# Altium PCB SKR MINI E3V2 PCB.pcbdoc (part 1 of 2)
Units mil, origin at the board's own origin, x right, y up, seen from the top; angles counter-clockwise.
Board outline 4610 x 3845 mil, 2 copper layers (Top Layer, Bottom Layer); 144 components, 119 nets, 524 pads, 201 vias.
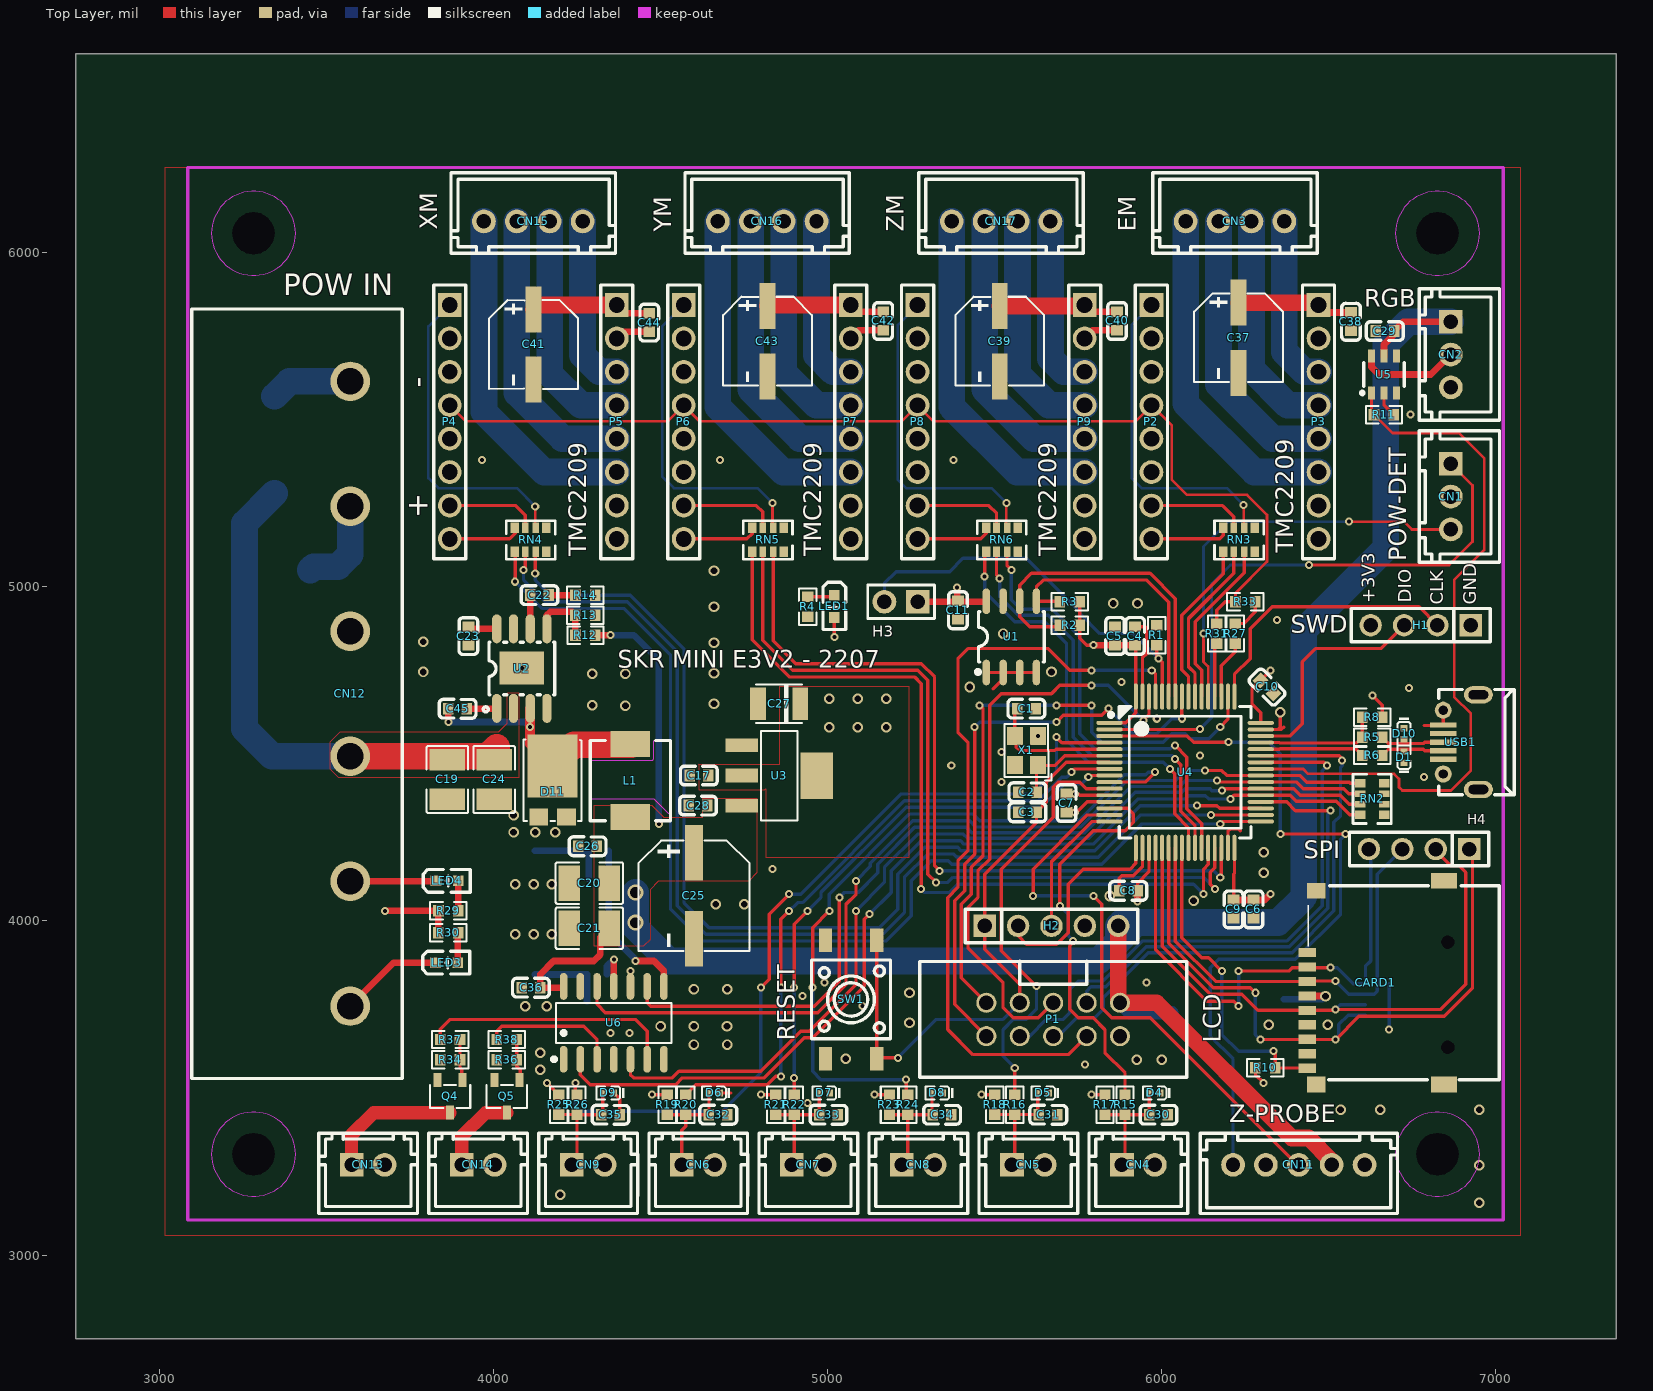
[diagram p0: Top Layer view]
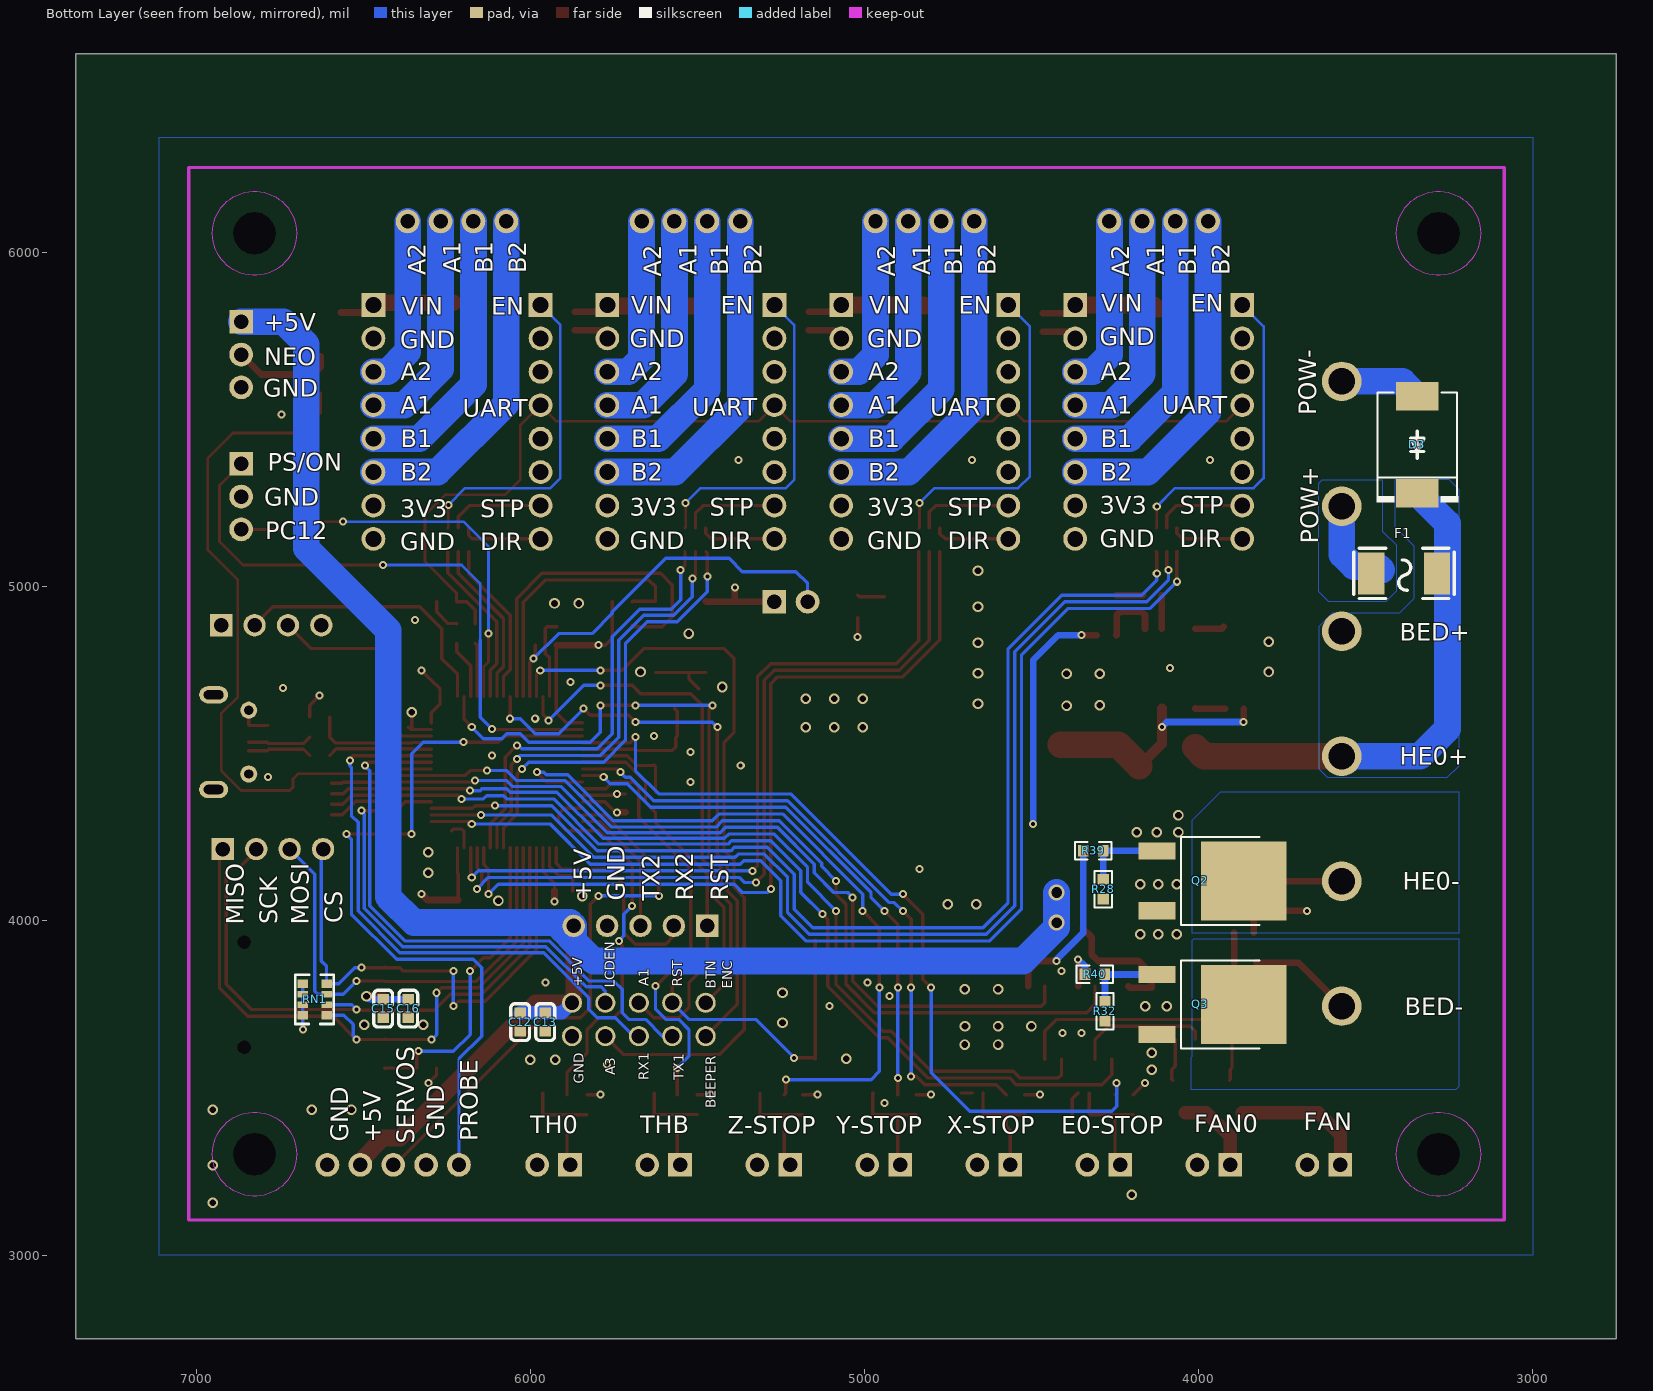
[diagram p1: Bottom Layer view, seen from below]

## Layer stack, top to bottom
Top Layer: signal copper (thickness not stored)
Dielectric: dielectric 12.6, FR-4, Dk 4.8
Bottom Layer: signal copper (thickness not stored)

## Board outline
7360,2750 2750,2750 2750,6595 7360,6595
cut-out: 3344.84,6057.76 ccw(c3281.85,6057.76) 3218.86,6057.76 ccw(c3281.85,6057.76)
cut-out: 6888.15,6057.76 ccw(c6825.16,6057.76) 6762.17,6057.76 ccw(c6825.16,6057.76)
cut-out: 3344.84,3301.85 ccw(c3281.85,3301.85) 3218.86,3301.85 ccw(c3281.85,3301.85)
cut-out: 6888.15,3301.85 ccw(c6825.16,3301.85) 6762.17,3301.85 ccw(c6825.16,3301.85)

## Components (designator, comment, footprint, x,y, rotation, side; value= is the part's Value field where it differs from the comment)
C1 "CC0603JRNPO9BN220" C0603 5595,4635 r0 top
C2 "CC0603JRNPO9BN220" C0603 5597.6,4385 r180 top
C3 "CC0603KRX5R8BB105" C0603 5597.6,4325 r180 top
C4 "CC0603KRX7R9BB104" C0603 5920,4852.6 r270 top
C5 "0603X106K160NT" C0603 5860,4852.6 r270 top
C6 "0603X106K160NT" C0603 6275,4035 r90 top
C7 "CC0603KRX7R9BB104" C0603 5715,4352.6 r270 top
C8 "CC0603KRX7R9BB104" C0603 5900,4090 r0 top
C9 "CC0603KRX7R9BB104" C0603 6215,4035 r90 top
C10 "CC0603KRX7R9BB104" C0603 6315,4700 r135 top
C11 "CC0603KRX7R9BB104" C0603 5390,4930 r90 top
C12 "0603X106K160NT" C0603 6030,3697.4 r90 bottom
C13 "CC0603KRX7R9BB104" C0603 5955,3697.4 r90 bottom
C15 "0603X106K160NT" C0603 6440,3737.6 r90 bottom
C16 "CC0603KRX7R9BB104" C0603 6365,3737.6 r90 bottom
C17 "CC0603KRX7R9BB104" C0603 4615,4435 r0 top
C19 "GRM32ER71H106KA12L" C1210 3862.04,4423.19 r90 top
C20 "GRM32ER71H106KA12L" C1210 4287.01,4113.16 r0 top
C21 "GRM32ER71H106KA12L" C1210 4287.01,3978.16 r0 top
C22 "CC0603KRX7R9BB472" C0603 4137.4,4975 r180 top
C23 "CC0603KRX7R9BB104" C0603 3925,4852.6 r90 top
C24 "GRM32ER71H106KA12L" C1210 4002.04,4423.19 r90 top
C25 "VEJ331M1ETR-0810" CAP-SMD_BD8.0-L8.3-W8.3-FD 4600,4075 r270 top
C26 "CC0603KRX7R9BB103" C0603 4282.01,4223.16 r0 top
C27 "TAJB106K016RNJ" CAP-SMD_L3.2-W2.8 4855,4650 r180 top
C28 "CC0603KRX7R9BB104" C0603 4612.4,4345 r0 top
C29 "CC0603KRX7R9BB104" C0603 6667.6,5765 r0 top
C30 "0603X106K160NT" C0603 5990,3420 r180 top
C31 "0603X106K160NT" C0603 5660,3420 r180 top
C32 "CC0603KRX7R9BB104" C0603 4672.4,3420 r180 top
C33 "CC0603KRX7R9BB104" C0603 5002.4,3420 r180 top
C34 "CC0603KRX7R9BB104" C0603 5342.4,3420 r180 top
C35 "CC0603KRX7R9BB104" C0603 4350,3420 r180 top
C36 "CC0603KRX7R9BB104" C0603 4112.4,3800 r0 top
C37 "DV101M035E077ETR" CAP-SMD_BD6.3-L6.6-W6.6-FD 6230,5745 r270 top
C38 "CC0603KRX7R9BB104" C0603 6566.3,5793.22 r90 top
C39 "DV101M035E077ETR" CAP-SMD_BD6.3-L6.6-W6.6-FD 5515,5735 r270 top
C40 "CC0603KRX7R9BB104" C0603 5866.3,5795.62 r90 top
C41 "DV101M035E077ETR" CAP-SMD_BD6.3-L6.6-W6.6-FD 4120,5725 r270 top
C42 "CC0603KRX7R9BB104" C0603 5166.3,5795.62 r90 top
C43 "DV101M035E077ETR" CAP-SMD_BD6.3-L6.6-W6.6-FD 4820,5735 r270 top
C44 "CC0603KRX7R9BB104" C0603 4466.3,5790.62 r90 top
C45 "CC0603KRX7R9BB103" C0603 3892.4,4635 r180 top
CARD1 "TF-01A" TF-SMD_TF-01A 6640,3815 r90 top
CN1 "HX25003-3A" CONN-TH_3P-P2.50_HX25003-3A 6865,5270 r90 top
CN2 "HX25003-3A" CONN-TH_3P-P2.50_HX25003-3A 6865,5695 r90 top
CN3 "HX25003-4A" CONN-TH_4P-P2.50_HX25003-4A 6219.14,6093.15 r180 top
CN4 "HX25003-2A" CONN-TH_2P-P2.50_HX25003-2A 5930,3270 r0 top
CN5 "HX25003-2A" CONN-TH_2P-P2.50_HX25003-2A 5600.71,3270 r0 top
CN6 "HX25003-2A" CONN-TH_2P-P2.50_HX25003-2A 4612.86,3270 r0 top
CN7 "HX25003-2A" CONN-TH_2P-P2.50_HX25003-2A 4942.14,3270 r0 top
CN8 "HX25003-2A" CONN-TH_2P-P2.50_HX25003-2A 5271.43,3270 r0 top
CN9 "HX25003-2A" CONN-TH_2P-P2.50_HX25003-2A 4283.57,3270 r0 top
CN11 "HX25003-5A" CONN-TH_5P-P2.50_HX25003-5A 6410,3270 r0 top
CN12 "HB9500M-9.5-6P" CONN-TH_6P-P9.50_HB9500-9.5-6P 3571.22,4679.8 r270 top
CN13 "HX25003-2A" CONN-TH_2P-P2.50_HX25003-2A 3625,3270 r0 top
CN14 "HX25003-2A" CONN-TH_2P-P2.50_HX25003-2A 3954.29,3270 r0 top
CN15 "HX25003-4A" CONN-TH_4P-P2.50_HX25003-4A 4119.14,6093.15 r180 top
CN16 "HX25003-4A" CONN-TH_4P-P2.50_HX25003-4A 4819.14,6093.15 r180 top
CN17 "HX25003-4A" CONN-TH_4P-P2.50_HX25003-4A 5519.14,6093.15 r180 top
D1 "0402ESDA-05N" D0402 6725,4490 r90 top
D3 "SMCJ24A_C699044" SMC_L6.9-W5.9-LS7.9-R-RD 3345,5424.9 r90 bottom
D4 "0402ESDA-05N" D0402 5978.6,3485 r180 top
D5 "0402ESDA-05N" D0402 5645,3485 r180 top
D6 "0402ESDA-05N" D0402 4660,3485 r180 top
D7 "0402ESDA-05N" D0402 4990,3485 r180 top
D8 "0402ESDA-05N" D0402 5328.6,3485 r180 top
D9 "0402ESDA-05N" D0402 4343.6,3485 r180 top
D10 "0402ESDA-05N" D0402 6725,4560 r270 top
D11 "SVM1045V" TO-277B_3P-L6.1-W4.3-LS6.5-BR 4177.01,4387.06 r270 top
F1 "JFC2410-1800TS" F2410 3385,5040 r180 bottom
H1 "B-2100S04P-A110" HDR-TH_4P-P2.54-V-M 6775,4885 r180 top
H2 "B-2100S05P-A110" HDR-TH_5P-P2.54-V-M 5670,3985 r0 top
H3 "PH-00218" HDR-TH_P2.54-V-M-R1-C2-S2.54 5220,4955 r90 top
H4 "B-2100S04P-A110" HDR-TH_4P-P2.54-V-M 6770,4215 r180 top
L1 "SLO0630H100MTT" IND-SMD_L6.0-W6.0_SLF6028T 4410,4420 r90 top
LED1 "19-217/GHC-YR1S2/3T" LED0603-R-RD 5020,4941.5 r270 top
LED3 "19-213/R6W-BP2Q2B/3T" LED0603-R-RD 3860,3875 r0 top
LED4 "19-213/R6W-BP2Q2B/3T" LED0603-R-RD 3861.5,4120 r0 top
P1 "2.54-2*5P简牛" IDC-TH_10P-P2.54_C5665 5675,3705 r180 top
P2 "2.54-1*8P母环保" HDR-TH_8P-P2.54-V-F-1 5969.14,5493.15 r270 top
P3 "2.54-1*8P母环保" HDR-TH_8P-P2.54-V-F-1 6469.14,5493.15 r270 top
P4 "2.54-1*8P母环保" HDR-TH_8P-P2.54-V-F-1 3869.14,5493.15 r270 top
P5 "2.54-1*8P母环保" HDR-TH_8P-P2.54-V-F-1 4369.14,5493.15 r270 top
P6 "2.54-1*8P母环保" HDR-TH_8P-P2.54-V-F-1 4569.14,5493.15 r270 top
P7 "2.54-1*8P母环保" HDR-TH_8P-P2.54-V-F-1 5069.14,5493.15 r270 top
P8 "2.54-1*8P母环保" HDR-TH_8P-P2.54-V-F-1 5269.14,5493.15 r270 top
P9 "2.54-1*8P母环保" HDR-TH_8P-P2.54-V-F-1 5769.14,5493.15 r270 top
Q2 "NCE6050KA" TO-252-2_L6.6-W6.1-P4.57-LS9.9-TL-CW 3994.6,4120 r180 bottom
Q3 "NCE6050KA" TO-252-2_L6.6-W6.1-P4.57-LS9.9-TL-CW 3994.6,3750 r180 bottom
Q4 "AO3400A_C20917" SOT-23-3_L2.9-W1.6-P1.90-LS2.8-BR 3870,3475 r90 top
Q5 "AO3400A_C20917" SOT-23-3_L2.9-W1.6-P1.90-LS2.8-BR 4040,3475 r90 top
R1 "RC0603FR-0710KL" R0603 5985,4854.7 r90 top
R2 "RC0603FR-074K7L" R0603 5725,4885 r0 top
R3 "RC0603FR-074K7L" R0603 5724.7,4955 r0 top
R4 "RC0603FR-071KL" R0603 4940,4940.3 r270 top
R5 "RC0603FR-0722RL" R0603 6630,4550 r0 top
R6 "RC0603FR-0722RL" R0603 6630,4495 r0 top
R8 "0603WAF1501T5E" R0603 6630,4610 r0 top
R10 "RC0603FR-071KL" R0603 6310,3560 r180 top
R11 "RC0603FR-0710KL" R0603 6665,5515 r180 top
R12 "0603WAF5362T5E" R0603 4275.3,4855 r0 top
R13 "RC0603FR-0710KL" R0603 4274.7,4915 r180 top
R14 "AC0603FR-0715KL" R0603 4275,4975 r180 top
R15 "RC0603FR-07100RL" R0603 5890,3450 r270 top
R16 "RC0603FR-07100RL" R0603 5560,3450 r270 top
R17 "RC0603FR-074K7L" R0603 5830,3450 r90 top
R18 "RC0603FR-074K7L" R0603 5500,3450.3 r90 top
R19 "RC0603FR-0710KL" R0603 4520,3450 r90 top
R20 "RC0603FR-07100RL" R0603 4575,3450 r270 top
R21 "RC0603FR-0710KL" R0603 4845,3450 r90 top
R22 "RC0603FR-07100RL" R0603 4900,3450 r270 top
R23 "RC0603FR-0710KL" R0603 5185,3450 r90 top
R24 "RC0603FR-07100RL" R0603 5240,3449.7 r270 top
R25 "RC0603FR-0710KL" R0603 4195,3450.3 r90 top
R26 "RC0603FR-07100RL" R0603 4250,3450 r270 top
R27 "RC0603FR-07100RL" R0603 6220,4860 r90 top
R28 "RC0603FR-07100KL" R0603 4285,4095.3 r90 bottom
R29 "RC0603FR-074K7L" R0603 3865,4030 r180 top
R30 "RC0603FR-074K7L" R0603 3864.7,3965 r180 top
R31 "RC0603FR-07100RL" R0603 6165,4860 r90 top
R32 "RC0603FR-07100KL" R0603 4280,3730 r90 bottom
R33 "RC0603FR-071KL" R0603 6250.3,4955 r180 top
R34 "RC0603FR-07100KL" R0603 3870.3,3585 r0 top
R36 "RC0603FR-07100KL" R0603 4040,3585 r0 top
R37 "RC0603FR-07100RL" R0603 3870.3,3645 r0 top
R38 "RC0603FR-07100RL" R0603 4040,3645 r0 top
R39 "RC0603FR-07100RL" R0603 4315,4210 r180 bottom
R40 "RC0603FR-07100RL" R0603 4310,3840 r180 bottom
RN1 "YC164-JR-0710KL" RES-ARRAY-SMD_0603-8P-L3.2-W1.6-BL 6645,3765 r90 bottom
RN2 "YC164-JR-0710KL" RES-ARRAY-SMD_0603-8P-L3.2-W1.6-BL 6630,4365 r90 top
RN3 "4D03WGJ0101T5E" RES-ARRAY-SMD_0603-8P-L3.2-W1.6-BL 6231.3,5140.62 r180 top
RN4 "4D03WGJ0101T5E" RES-ARRAY-SMD_0603-8P-L3.2-W1.6-BL 4111.3,5140.62 r180 top
RN5 "4D03WGJ0101T5E" RES-ARRAY-SMD_0603-8P-L3.2-W1.6-BL 4821.3,5140.62 r180 top
RN6 "4D03WGJ0101T5E" RES-ARRAY-SMD_0603-8P-L3.2-W1.6-BL 5521.3,5140.62 r180 top
SW1 "K2-6639SP-C4SC-04" KEY-SMD_4P-L6.0-W6.0-P3.90-LS10.0 5070,3765 r270 top
U1 "AT24C32D-SSHM-T" SOIC-8_L5.0-W4.0-P1.27-LS6.0-BL 5550,4850 r0 top
U2 "SGM6132YPS8G/TR" SOIC-8_L4.9-W3.9-P1.27-LS6.0-BL-EP3.4 4085,4755 r0 top
U3 "SK1117-3.3" SOT-223_L6.5-W3.5-P2.30-LS7.0-BR 4855,4435 r180 top
U4 "STM32F103RCT6" LQFP-64_L10.0-W10.0-P0.50-LS12.0-BL 6070,4445 r270 top
U5 "SN74LVC2G17DBVR" SOT-23-6_L2.9-W1.6-P0.95-LS2.8-BR 6665,5635 r270 top
U6 "SN74LVC125ADR" SOIC-14_L8.7-W3.9-P1.27-LS6.0-BL 4360,3695 r0 top
USB1 "MicroXNJ" MICRO-USB-SMD_MICROXNJ 6895,4535 r90 top
X1 "TAXM8M4RDBCCT2T" OSC-SMD_4P-L3.2-W2.5-BL 5595,4510 r90 top

## Footprints (in the part's own frame and the unit in brackets; to place one, negate y for a bottom-side part, rotate by r counter-clockwise, add the part's x,y. Pads: shape width x height; smd on the part's side, far side on the other; paste and mask are expansions set on the pad)
C0603 [mil]
  rect 31.5x35.4 smd paste+0 mask+2: 1(-27.6,0) 2(27.6,0)
  silkscreen extent -55,-28 55,28
C1210 [mil]
  rect 64.4x106.3 smd paste-3937.01 mask+2: 1(-59.7,0) 2(59.7,0)
  silkscreen extent -101,-62 101,62
CAP-SMD_BD6.3-L6.6-W6.6-FD [mil]
  rect 137.8x47.2 smd paste+0 mask+2: 1(-105.1,0) 2(105.1,0)
  silkscreen extent -133,-133 133,133
CAP-SMD_BD8.0-L8.3-W8.3-FD [mil]
  rect 165.4x55.1 smd paste+0 mask+2: 1(-128.6,0) 2(128.6,0)
  silkscreen extent -165,-166 165,166
CAP-SMD_L3.2-W2.8 [mil]
  rect 47.2x98.4 smd paste+0 mask+2: 1(-63,0) 2(63,0)
  silkscreen extent -69,-57 69,57
CONN-TH_2P-P2.50_HX25003-2A [mil]
  rect 70.9x70.9 hole 43.3 paste+0 mask+1.97: 1(-49.2,0)
  round 70.9 hole 43.3 paste+0 mask+1.97: 2(49.2,0)
  silkscreen extent -148,-146 148,95
CONN-TH_3P-P2.50_HX25003-3A [mil]
  rect 70.9x70.9 hole 43.3 paste+0 mask+2: 1(98.4,0)
  round 70.9 hole 43.3 paste+0 mask+2: 2(0,0) 3(-98.4,0)
  silkscreen extent -197,-146 197,95
CONN-TH_4P-P2.50_HX25003-4A [mil]
  round 70.9 hole 43.3 paste+0 mask+2: 1(-147.6,0) 2(-49.2,0) 3(49.2,0) 4(147.6,0)
  silkscreen extent -246,-146 246,95
CONN-TH_5P-P2.50_HX25003-5A [mil]
  round 70.9 hole 43.3 paste+0 mask+2: 1(-196.8,0) 2(-98.4,0) 3(0,0) 4(98.4,0) 5(196.9,0)
  silkscreen extent -295,-146 295,94
CONN-TH_6P-P9.50_HB9500-9.5-6P [mil]
  round 118.1 hole 78.7 paste+0 mask+2: 1(935,0) 2(561,0) 3(187,0) 4(-187,0) 5(-561,0) 6(-935,0)
  silkscreen extent -1152,-474 1152,156
D0402 [mil]
  rect 19.9x21.7 smd paste-3937.01 mask+2: 1(-16.4,0) 2(16.4,0)
  silkscreen extent -47,-20 35,20
F2410 [mil]
  rect 78.7x126 smd paste+0 mask+2: 1(-98.4,0) 2(98.4,0)
  silkscreen extent -150,-75 150,75
HDR-TH_4P-P2.54-V-M [mil]
  rect 66.9x66.9 hole 43.3 paste+0 mask+2: 1(-150,0)
  round 66.9 hole 43.3 paste+0 mask+2: 2(-50,0) 3(50,0) 4(150,0)
  silkscreen extent -208,-50 208,50
HDR-TH_5P-P2.54-V-M [mil]
  rect 66.9x66.9 hole 43.3 paste+0 mask+2: 1(-200,0)
  round 66.9 hole 43.3 paste+0 mask+2: 2(-100,0) 3(0,0) 4(100,0) 5(200,0)
  silkscreen extent -258,-50 258,50
HDR-TH_8P-P2.54-V-F-1 [mil]
  rect 70.9x70.9 hole 47.2 paste+0 mask+2: 1(-350,0)
  round 70.9 hole 47.2 paste+0 mask+2: 2(-250,0) 3(-150,0) 4(-50,0) 5(50,0) 6(150,0) 7(250,0) 8(350,0)
  silkscreen extent -410,-48 410,48
HDR-TH_P2.54-V-M-R1-C2-S2.54 [mil]
  rect 70.9x70.9 hole 43.3 paste+0 mask+2: 1(0,-50)
  round 70.9 hole 43.3 paste+0 mask+2: 2(0,50)
  silkscreen extent -50,-100 50,100
IDC-TH_10P-P2.54_C5665 [mil]
  round 60 hole 43.3 paste+0 mask+2: 1(-200,-50) 2(-200,50) 3(-100,-50) 4(-100,50) 5(0,-50) 6(0,50) 7(100,-50) 8(100,50) 9(200,-50) 10(200,50)
  silkscreen extent -400,-175 400,173
IND-SMD_L6.0-W6.0_SLF6028T [mil]
  rect 76.8x118.1 smd paste+0 mask+2: 1(109.3,0) 2(-109.2,0)
  silkscreen extent -120,-120 120,120
KEY-SMD_4P-L6.0-W6.0-P3.90-LS10.0 [mil]
  rect 70.9x39.4 smd paste+0 mask+2: 1(-177.2,76.8) 2(177.2,76.8) 3(-177.2,-76.8) 4(177.2,-76.8)
  silkscreen extent -118,-118 118,118
LED0603-R-RD [mil]
  rect 31.5x31.5 smd paste+0 mask+2: 1(33.5,0) 2(-33.5,0)
  silkscreen extent -72,-34 70,34
LQFP-64_L10.0-W10.0-P0.50-LS12.0-BL [mil]
  oval 11.8x78.7 smd paste+0 mask+2: 1(-147.6,-226.4) 2(-127.9,-226.4) 3(-108.3,-226.4) 4(-88.6,-226.4) 5(-68.9,-226.4) 6(-49.2,-226.4) 7(-29.5,-226.4) 8(-9.8,-226.4) 9(9.8,-226.4) 10(29.5,-226.4) 11(49.2,-226.4) 12(68.9,-226.4) 13(88.6,-226.4) 14(108.3,-226.4) 15(128,-226.4) 16(147.6,-226.4) 33(147.6,226.4) 34(128,226.4) 35(108.3,226.4) 36(88.6,226.4) 37(68.9,226.4) 38(49.2,226.4) 39(29.5,226.4) 40(9.8,226.4) 41(-9.8,226.4) 42(-29.5,226.4) 43(-49.2,226.4) 44(-68.9,226.4) 45(-88.6,226.4) 46(-108.3,226.4) 47(-127.9,226.4) 48(-147.6,226.4)
  oval 78.7x11.8 smd paste+0 mask+2: 17(226.4,-147.6) 18(226.4,-127.9) 19(226.4,-108.3) 20(226.4,-88.6) 21(226.4,-68.9) 22(226.4,-49.2) 23(226.4,-29.5) 24(226.4,-9.8) 25(226.4,9.8) 26(226.4,29.5) 27(226.4,49.2) 28(226.4,68.9) 29(226.4,88.6) 30(226.4,108.3) 31(226.4,128) 32(226.4,147.6) 49(-226.4,147.6) 50(-226.4,128) 51(-226.4,108.3) 52(-226.4,88.6) 53(-226.4,68.9) 54(-226.4,49.2) 55(-226.4,29.5) 56(-226.4,9.8) 57(-226.4,-9.8) 58(-226.4,-29.5) 59(-226.4,-49.2) 60(-226.4,-68.9) 61(-226.4,-88.6) 62(-226.4,-108.3) 63(-226.4,-127.9) 64(-226.4,-147.6)
  silkscreen extent -197,-228 197,197
MICRO-USB-SMD_MICROXNJ [mil]
  rect 15.7x78.7 smd paste-3937.01 mask+2: 1(-51.2,52.3) 2(-25.6,52.3) 3(0,52.3) 4(25.6,52.3) 5(51.2,52.3)
  round 51.2 hole 27.6 paste+0 mask+2: 6(95.5,52.6) 9(-95.5,52.6)
  oval 51.2x86.6 hole 27.6 slot 59.1 at 90 deg paste+0 mask+2: 7(141.7,-52.6) 8(-141.7,-52.6)
  silkscreen extent -158,-160 158,66
OSC-SMD_4P-L3.2-W2.5-BL [mil]
  rect 55.1x47.2 smd paste+0 mask+2: 1(-43.3,-34.4) 2(43.3,-34.4) 3(43.3,34.5) 4(-43.3,34.5)
  silkscreen extent -90,-75 80,65
R0603 [mil]
  rect 31.8x34 smd paste-3937.01 mask+2: 1(-29.7,0) 2(29.7,0)
  silkscreen extent -54,-26 54,26
RES-ARRAY-SMD_0603-8P-L3.2-W1.6-BL [mil]
  rect 25.6x31.5 smd paste+0 mask+2: 1(-47.2,-35.4) 4(47.2,-35.4) 5(47.2,35.4) 8(-47.2,35.4)
  rect 19.7x31.5 smd paste+0 mask+2: 2(-15.7,-35.4) 3(15.8,-35.4) 6(15.8,35.4) 7(-15.7,35.4)
  silkscreen extent -74,-57 74,58
SMC_L6.9-W5.9-LS7.9-R-RD [mil]
  rect 84.9x127.6 smd paste+0 mask+2: 1(145.1,0) 2(-145.1,0)
  silkscreen extent -172,-122 156,122
SOIC-8_L4.9-W3.9-P1.27-LS6.0-BL-EP3.4 [mil]
  oval 27.6x86.6 smd paste+0 mask+1.97: 1(-75,-119) 2(-25,-119) 3(25,-119) 4(75,-119) 5(75,119) 6(25,119) 7(-25,119) 8(-75,119)
  rect 133.9x98.4 smd paste+0 mask+1.97: 9(0,2)
  silkscreen extent -115,-129 98,79
SOIC-8_L5.0-W4.0-P1.27-LS6.0-BL [mil]
  oval 22.4x76.8 smd paste+0 mask+2: 1(-75,-106.5) 2(-25,-106.5) 3(25,-106.5) 4(75,-106.5) 5(75,106.5) 6(25,106.5) 7(-25,106.5) 8(-75,106.5)
  silkscreen extent -106,-111 98,75
SOIC-14_L8.7-W3.9-P1.27-LS6.0-BL [mil]
  oval 22.6x80.2 smd paste+0 mask+2: 1(-150,-109) 2(-100,-109) 3(-50,-109) 4(0,-109) 5(50,-109) 6(100,-109) 7(150,-109) 8(150,109) 9(100,109) 10(50,109) 11(0,109) 12(-50,109) 13(-100,109) 14(-150,109)
  silkscreen extent -185,-115 173,60
SOT-23-3_L2.9-W1.6-P1.90-LS2.8-BR [mil]
  rect 42.1x23.6 smd paste+0 mask+2: 1(48.6,-37.4) 2(48.6,37.4) 3(-48.6,0)
  silkscreen extent -35,-60 35,60
SOT-23-6_L2.9-W1.6-P0.95-LS2.8-BR [mil]
  rect 39.4x21.7 smd paste+0 mask+2: 1(55.1,-37.4) 2(55.1,0) 3(55.1,37.4) 4(-55.1,37.4) 5(-55.1,0) 6(-55.1,-37.4)
  silkscreen extent -35,-70 60,61
SOT-223_L6.5-W3.5-P2.30-LS7.0-BR [mil]
  rect 97x41.3 smd paste+0 mask+2: 1(112.5,-90.5) 2(112.5,0) 3(112.5,90.6)
  rect 97x139.4 smd paste+0 mask+2: 4(-112.5,0)
  silkscreen extent -55,-134 55,134
TF-SMD_TF-01A [mil]
  rect 27.6x51.2 smd paste+0 mask+2: 1(90.2,204.7) 2(46.9,204.7) 3(3.8,204.7) 4(-39.5,204.7) 5(-82.8,204.7) 6(-126,204.7) 7(-169.2,204.7) 8(-212.4,204.7) 9(-255.9,204.7)
  rect 47.2x55 smd paste+0 mask+2: 10(-305,177.2) 13(275,177.2)
  rect 47.2x78.7 smd paste+0 mask+2: 11(-305,-204.7) 12(305,-204.7)
  Multi-Layer board cut-out: -193.5,-235.8 -184.95,-233.85 -178.1,-228.38 -174.29,-220.48 -174.29,-211.72 -178.1,-203.82 -184.95,-198.35 -193.5,-196.4 -193.5,-196.4 -202.05,-198.35 -208.9,-203.82 -212.71,-211.72 -212.71,-220.48 -208.9,-228.38 -202.05,-233.85 -193.5,-235.8
  Multi-Layer board cut-out: 121.4,-235.7 129.95,-233.75 136.8,-228.28 140.61,-220.38 140.61,-211.62 136.8,-203.72 129.95,-198.25 121.4,-196.3 121.4,-196.3 112.85,-198.25 106,-203.72 102.19,-211.62 102.19,-220.38 106,-228.28 112.85,-233.75 121.4,-235.7
  silkscreen extent -290,-370 290,202
TO-252-2_L6.6-W6.1-P4.57-LS9.9-TL-CW [mil]
  rect 110.2x51.2 smd paste+0 mask+2: 1(-129.6,89.5) 3(-129.6,-89.5)
  rect 255.9x236.2 smd paste+0 mask+2: 2(129.6,0)
  silkscreen extent -57,-132 178,132
TO-277B_3P-L6.1-W4.3-LS6.5-BR [mil]
  rect 50.8x56 smd paste+0 mask+2: 1(76.1,-41.3) 2(76.1,41.3)
  rect 189x149.6 smd paste+0 mask+2: 3(-76.1,0)
  silkscreen extent -155,-87 89,87

## Via types
v1: diameter 24.02, hole 12.01, Top Layer to Bottom Layer, 135 vias
v2: diameter 31.5, hole 19.68, Top Layer to Bottom Layer, 64 vias
v3: diameter 47.24, hole 31.5, Top Layer to Bottom Layer, 2 vias

## Nets (pads, with @x,y where several pads share a name; then routed paths per layer and width w, separated by ;. In a path a pad name is that pad's centre, name@x,y a point inside that pad or via, vN(x,y) a via of type N, cw(c..) or ccw(c..) an arc to the next point about the centre after c; other vN are vias at no path point)
$1N1551: C2.1 U4.6 X1.1 | length 310.4
  Top Layer w10: C2.1@5625.2,4385 5625.2,4462.5 X1.1@5629.4,4466.7 5631.1,4465 5680,4465 5709.2,4494.2 U4.6@5843.6,4494.2
$1N1560: C1.1 U4.5 X1.3 | length 404.1
  Top Layer w10: C1.1@5567.4,4635 5560.5,4628.1 X1.3@5560.5,4553.3 5565,4548.8 5565,4520 5575,4510 5680,4510 5683.9,4513.9 U4.5@5843.6,4513.9
$1N12001: D10.2 R5.2 USB1.3 | length 193.1
  Top Layer w9.7: R5.2@6659.7,4550 6679.15,4530.55 6745.15,4530.55 ; 6745,4530.7 6745.15,4530.55 ; USB1.3@6842.7,4535 6786.8,4535 6782.35,4530.55 6745.15,4530.55
$1N12925: D1.2 R6.2 USB1.2 | length 192.9
  Top Layer w9.7: R6.2@6659.7,4495 6678.55,4513.85 6745.15,4513.85 ; 6745,4513.7 6745.15,4513.85 ; USB1.2@6842.7,4509.4 6786.8,4509.4 6782.35,4513.85 6745.15,4513.85
$1N23264: C45.2 D11.3 L1.1 U2.3 | length 753.8
  Top Layer w20: C45.2@3864.8,4635 v1(3864.8,4595.2) v1@3865,4595
  Top Layer w30: U2.3@4110,4636 v1(4110,4580) 4110,4530.18 D11.3@4177.01,4463.16
  Top Layer w80: D11.3@4177.01,4463.16 4241.31,4527.46 L1.1@4412.01,4527.46
  Bottom Layer w20: v1(3864.8,4595.2) 4094.8,4595.2 v1(4110,4580)
$1N23655: R12.1 R13.2 U2.5 | length 194.5
  Top Layer w20: U2.5@4160,4874 4160,4915 4170,4925 4235,4925 R13.2@4245,4915 4245,4855.6 R12.1@4245.6,4855
$1N26213: C22.2 U2.6 | length 101.1
  Top Layer w20: C22.2@4109.8,4975 4110,4974.8 U2.6@4110,4874
$1N26796: C23.2 U2.8 | length 87.6
  Top Layer w20: C23.2@3925,4880.2 3931.2,4874 U2.8@4010,4874
$1N41961: CN2.2 U5.6 | length 304.2
  Top Layer w20: U5.6@6627.6,5690.1 6627.6,5657.4 6650,5635 6805,5635 CN2.2@6865,5695
$1N44483: C30.2 CN4.1 D4.2 R15.2 R17.1 | length 351.4
  Top Layer w10: R17.1@5830,3420.3 R15.2@5890,3420.3 ; CN4.1@5880.8,3270 5890,3279.2 R15.2@5890,3420.3 ; D4.2@5962.2,3485 C30.2@5962.2,3420.2 ; C30.2@5962.4,3420 C30.2@5962.2,3420.2 ; R15.2@5890,3420.3 5962.1,3420.3 C30.2@5962.2,3420.2
$1N47348: C31.2 CN5.1 D5.2 R16.2 R18.1 | length 352.2
  Top Layer w10: R18.1@5500,3420.6 C31.2@5631.8,3420.6 ; CN5.1@5551.51,3270 5560,3278.49 R16.2@5560,3420.3 ; D5.2@5628.6,3485 5628.6,3423.8 C31.2@5631.8,3420.6 ; C31.2@5632.4,3420 C31.2@5631.8,3420.6
$1N49472: C32.2 CN6.1 D6.2 R19.1 R20.2 | length 345.4
  Top Layer w10: R19.1@4520,3420.3 R20.2@4575,3420.3 ; CN6.1@4563.66,3270 4563.66,3373.66 4575,3385 R20.2@4575,3420.3 ; D6.2@4643.6,3485 4644.8,3483.8 C32.2@4644.8,3420 4575.3,3420 R20.2@4575,3420.3
$1N50882: C33.2 CN7.1 D7.2 R21.1 R22.2 | length 350.7
  Top Layer w10: R21.1@4845,3420.3 R22.2@4900,3420.3 ; CN7.1@4892.94,3270 4900,3277.06 R22.2@4900,3420.3 ; D7.2@4973.6,3485 4974.8,3483.8 C33.2@4974.8,3425.49 ; C33.2@4974.8,3420 C33.2@4974.8,3425.49 ; R22.2@4900,3420.3 4969.61,3420.3 C33.2@4974.8,3425.49
$1N54182: C34.2 CN8.1 D8.2 R23.1 R24.2 | length 352.9
  Top Layer w10: R23.1@5185,3420.3 C34.2@5314.5,3420.3 ; CN8.1@5222.23,3270 5240,3287.77 R24.2@5240,3420 ; D8.2@5312.2,3485 5312.2,3422.6 C34.2@5314.5,3420.3 ; C34.2@5314.8,3420 C34.2@5314.5,3420.3
$1N54185: C35.2 CN9.1 D9.2 R25.1 R26.2 | length 351.4
  Top Layer w10: R25.1@4195,3420.6 4249.7,3420.6 R26.2@4250,3420.3 ; CN9.1@4234.37,3270 4250,3285.63 R26.2@4250,3420.3 ; D9.2@4327.2,3485 4327.2,3424.8 C35.2@4322.4,3420 4322.1,3420.3 R26.2@4250,3420.3
$1N81715: CN13.1 Q4.3 | length 412.8
  Top Layer w40: CN13.1@3575.8,3270 3575,3270.8 3575,3360 3641.4,3426.4 Q4.3@3870,3426.4
$1N82550: CN14.1 Q5.3 | length 249.5
  Top Layer w40: CN14.1@3905.09,3270 3905.09,3355.09 3976.4,3426.4 Q5.3@4040,3426.4
$1N98634: Q4.1 R34.2 R37.2 | length 124.5
  Top Layer w10: R37.2@3900,3645 R34.2@3900,3585 3900,3560 3905,3555 3905,3526 Q4.1@3907.4,3523.6
$1N98894: Q5.1 R36.2 R38.2 | length 126.7
  Top Layer w10: R38.2@4069.7,3645 R36.2@4069.7,3585 4069.7,3565.3 4080,3555 4080,3526.2 Q5.1@4077.4,3523.6
$1N99155: Q2.1 R28.2 R39.2 | length 245.9
  Bottom Layer w20: Q2.1@4124.2,4209.5 R39.2@4284.8,4209.5 ; R28.2@4285,4125 4285,4209.3 R39.2@4284.8,4209.5 ; R39.2@4285.3,4210 R39.2@4284.8,4209.5
$1N99417: Q3.1 R32.2 R40.2 | length 236.2
  Bottom Layer w20: Q3.1@4124.2,3839.5 R40.2@4279.8,3839.5 ; R32.2@4280,3759.7 4280,3839.3 R40.2@4279.8,3839.5 ; R40.2@4280.3,3840 R40.2@4279.8,3839.5
$1N109260: CN3.1 P3.3 | length 517.2
  Bottom Layer w80: CN3.1@6366.74,6093.15 6366.74,5703.26 6426.85,5643.15 P3.3@6469.14,5643.15
$1N109394: CN3.2 P3.4 | length 687.2
  Bottom Layer w80: CN3.2@6268.34,6093.15 6268.34,5651.66 6376.85,5543.15 P3.4@6469.14,5543.15
$1N109528: CN3.3 P3.5 | length 854.4
  Bottom Layer w80: CN3.3@6169.94,6093.15 6169.94,5605.06 6331.85,5443.15 P3.5@6469.14,5443.15
$1N109662: CN3.4 P3.6 | length 1027.3
  Bottom Layer w80: CN3.4@6071.54,6093.15 6071.54,5548.46 6276.85,5343.15 P3.6@6469.14,5343.15
$1N113496: CN15.1 P5.3 | length 523
  Bottom Layer w80: CN15.1@4266.74,6093.15 4266.74,5693.26 4316.85,5643.15 P5.3@4369.14,5643.15
$1N113497: CN15.2 P5.4 | length 696
  Bottom Layer w80: CN15.2@4168.34,6093.15 4168.34,5636.66 4261.85,5543.15 P5.4@4369.14,5543.15
$1N113498: CN15.3 P5.5 | length 869
  Bottom Layer w80: CN15.3@4069.94,6093.15 4069.94,5580.06 4206.85,5443.15 P5.5@4369.14,5443.15
$1N113499: CN15.4 P5.6 | length 1042
  Bottom Layer w80: CN15.4@3971.54,6093.15 3971.54,5523.46 4151.85,5343.15 P5.6@4369.14,5343.15
$1N114448: CN16.1 P7.3 | length 523
  Bottom Layer w80: CN16.1@4966.74,6093.15 4966.74,5693.26 5016.85,5643.15 P7.3@5069.14,5643.15
$1N114449: CN16.2 P7.4 | length 693.1
  Bottom Layer w80: CN16.2@4868.34,6093.15 4868.34,5641.66 4966.85,5543.15 P7.4@5069.14,5543.15
$1N114450: CN16.3 P7.5 | length 863.1
  Bottom Layer w80: CN16.3@4769.94,6093.15 4769.94,5590.06 4916.85,5443.15 P7.5@5069.14,5443.15
$1N114451: CN16.4 P7.6 | length 1033.2
  Bottom Layer w80: CN16.4@4671.54,6093.15 4671.54,5538.46 4866.85,5343.15 P7.6@5069.14,5343.15
$1N117361: CN17.1 P9.3 | length 528.9
  Bottom Layer w80: CN17.1@5666.74,6093.15 5666.74,5683.26 5706.85,5643.15 P9.3@5769.14,5643.15
$1N117362: CN17.2 P9.4 | length 696
  Bottom Layer w80: CN17.2@5568.34,6093.15 5568.34,5636.66 5661.85,5543.15 P9.4@5769.14,5543.15
$1N117363: CN17.3 P9.5 | length 863.1
  Bottom Layer w80: CN17.3@5469.94,6093.15 5469.94,5590.06 5616.85,5443.15 P9.5@5769.14,5443.15
$1N117364: CN17.4 P9.6 | length 1033.2
  Bottom Layer w80: CN17.4@5371.54,6093.15 5371.54,5538.46 5566.85,5343.15 P9.6@5769.14,5343.15
$1N128379: R27.2 R33.1 | length 104.6
  Top Layer w10: R27.2@6220,4889.7 6220.3,4890 6245,4890 6280,4925 R33.1@6280,4955
$1N138260: LED1.2 R4.1 | length 82.1
  Top Layer w10: R4.1@4940,4970 5015,4970 LED1.2@5020,4975
$1N149231: C22.1 R14.2 | length 80.3
  Top Layer w20: C22.1@4165,4975 R14.2@4245.3,4975
$1N149234: LED3.1 R30.1 | length 90.4
  Top Layer w20: LED3.1@3893.5,3875 3893.5,3964.1 R30.1@3894.4,3965
$1N149235: LED4.1 R29.1 | length 90.1
  Top Layer w20: R29.1@3894.7,4030 3895,4030.3 LED4.1@3895,4120
$1N164058: CN12.5 F1.1 | length 283.1
  Bottom Layer w80: F1.1@3451.8,5050 3461.8,5060 3535,5060 3571.22,5096.22 CN12.5@3571.22,5240.8
$1N169749: C45.1 U2.1 | length 90.4
  Top Layer w20: C45.1@3920,4635 4009,4635 U2.1@4010,4636
+3V3: C4.2 C5.2 C6.2 C7.2 C8.2 C9.2 C10.2 C11.2 C15.2 C16.2 C17.2 C27.1 CARD1.4 H1.4 H3.1 LED1.1 P2.2 P2.3 P3.7 P5.7 P6.3 P7.7 P8.2 P9.7 R2.2 R3.2 R8.2 R10.2 R17.2 R18.2 R19.2 R21.2 R23.2 R25.2 RN1.5 RN1.6 RN1.7 RN1.8 U1.8 U3.2 U3.4 U4.1 U4.13 U4.19 U4.32 U4.48 U4.64 | length 2389
  Top Layer w10: v1(4160,3515) R25.2@4195,3480 ; v1(4475,3480) 4475.3,3479.7 R19.2@4520,3479.7 ; v1(4800,3480) 4844.7,3480 R21.2@4845,3479.7 ; v1(5020,4850) LED1.1@5020,4908 ; v1(5140,3480) 5140.3,3479.7 R23.2@5185,3479.7 ; C11.2@5387.4,4955 5387.6,4955.2 C11.2@5390,4957.6 ; v1(5460,3480) R18.2@5500,3480 ; v1(5740,4325) 5745,4325 5776.4,4356.4 U4.13@5843.6,4356.4 ; R3.2@5754.4,4955 5754.4,4845.6 5775,4825 v1(5795,4825) ; v1(5790,3480) 5790.3,3479.7 R17.2@5830,3479.7 ; U4.1@5843.6,4592.6 5892.6,4592.6 5922.4,4622.4 U4.64@5922.4,4671.4 5922.4,4822.6 C4.2@5920,4825 ; C8.2@5927.6,4090 5927.6,4112.6 5961.7,4146.7 U4.19@5961.7,4218.6 ; C9.2@6215,4062.6 6215,4140 6217.6,4142.6 U4.32@6217.6,4218.6 ; R10.2@6280.3,3560 6280.3,3539.7 v1(6305,3515) ; U4.48@6296.4,4592.6 6296.4,4623.6 6270,4650 6270,4694.03 C10.2@6295.48,4719.52 6325,4749.03 v1(6325,4750) ; v1(6630,4675) 6659.7,4645.3 R8.2@6659.7,4610
  Top Layer w20: H3.1@5270,4955 C11.2@5387.4,4955 ; v1(5387.6,4997.4) 5387.6,4955.2 5387.6,4955 5473.5,4955 U1.8@5475,4956.5 ; C7.2@5715,4325 v1(5740,4325) ; v1(5795,4825) C5.2@5860,4825 C4.2@5920,4825 ; v1(5927.6,4057.4) C8.2@5927.6,4090 ; C9.2@6215,4062.6 C6.2@6275,4062.6 6307.6,4062.6 v1(6325,4080) ; CARD1.4@6435.3,3775.5 6435.8,3775 v2(6490,3775)
  Bottom Layer w10: v1(6680,3675) 6680.4,3675.4 RN1.8@6680.4,3717.8 RN1.7@6680.4,3749.3 RN1.6@6680.4,3780.8 RN1.5@6680.4,3812.2
  Bottom Layer w20: C16.2@6365,3765.2 C15.2@6440,3765.2 6480.2,3765.2 v2(6490,3775)
  other v2: 5005,4580 5090,4580 5175,4580 5005,4665 5090,4665 5175,4665
+5V: C12.2 C13.2 C20.2 C21.2 C25.1 C26.2 C28.2 C29.2 C36.2 CN2.1 CN11.4 H2.5 L1.2 P1.1 R12.2 U3.3 U5.5 U6.14 | length 6954.9
  Top Layer w20: U6.14@4210,3804 4206,3800 C36.2@4140,3800 4140,3840 4180,3880 4300,3880 4320,3900 4320,3951.45 C21.2@4346.71,3978.16 ; R12.2@4305,4855 v1(4350,4855) ; U5.5@6665,5690.1 6665,5725 6695.2,5755.2 C29.2@6695.2,5765 6723.6,5793.4 CN2.1@6865,5793.4
  Top Layer w50: H2.5@5870,3985 5870,3760 P1.1@5875,3755 5985,3755 6390,3350 6440,3350 6508.4,3281.6 CN11.4@6508.4,3270
  Bottom Layer w20: v1(4350,4855) 4420,4855 4495,4780 v1(4495,4290)
  Bottom Layer w40: P1.1@5875,3755 5905,3725 C13.2@5955,3725 C12.2@6030,3725
  Bottom Layer w80: v3(4425,4085) 4425,3980 4525,3880 5810,3880 5870,3940 ; H2.5@5880,3995 5925,3995 ; CN2.1@6865,5793.4 6738.4,5793.4 6670,5725 6670,5115 6425,4870 6425,4072.01 6347.99,3995 5925,3995 ; 5870,3940 H2.5@5870,3985 5902.5,3972.5 ; 5870,3940 5902.5,3972.5 ; 5902.5,3972.5 5925,3995
  other v3: 4425,3995
A1: P1.5 U4.62 | length 1763.1
  Top Layer w10: P1.5@5675,3755 5630,3710 5555,3710 5525,3740 5525,3815 5420,3920 5420,4040 5450,4070 5450,4150 5485,4185 5485,4645 5520,4680 5670,4680 5695,4705 v1(5790,4705) ; v1(5945,4600) 5961.7,4616.7 U4.62@5961.7,4671.4
  Bottom Layer w10: v1(5790,4705) 5840,4705 v1(5945,4600)
A3: P1.4 U4.61 | length 2318.8
  Top Layer w10: P1.4@5775,3655 5720,3600 5435,3600 5360,3675 5360,4070 5390,4100 5390,4180 5420,4210 5420,4535 5390,4565 5390,4785 5420,4815 5660,4815 5725,4750 v1(5790,4750) ; v1(5970,4750) 5981.4,4738.6 U4.61@5981.4,4671.4
  Bottom Layer w10: v1(5790,4750) v1(5970,4750)
BED: R40.1 U6.11 | length 134.4
  Top Layer w20: U6.11@4360,3804 v1(4360,3885)
  Bottom Layer w20: R40.1@4339.7,3840 4339.7,3864.7 v1(4360,3885)
BED-PWM: RN2.5 U4.40 U6.12 | length 2850.5
  Top Layer w10: U6.12@4310,3804 4310,3750 4335,3725 4970,3725 5055,3810 5055,4050 5085,4080 v1(5085,4120) ; v1(6130,4450) 6180,4450 6194.8,4435.2 U4.40@6296.4,4435.2 6413.31,4435.2 6433.51,4415 6561,4415 6563.8,4412.2 RN2.5@6594.6,4412.2
  Bottom Layer w10: v1(5085,4120) 5127.87,4162.87 5127.87,4172.87 5255,4300 5424.87,4300 5443.87,4281 5756,4281 5895,4420 6040,4420 6070,4450 v1(6130,4450)
BED_CT: CN12.1 LED3.2 Q3.2 | length 309.2
  Top Layer w20: CN12.1@3571.22,3744.8 3701.42,3875 LED3.2@3826.5,3875
BEEPER: P1.10 U4.57 | length 1748.2
  Top Layer w10: v1(5440,4580) 5440,4200 5410,4170 5410,4090 5380,4060 5380,3750 P1.10@5475,3655 ; v1(5685,4595) 5705,4615 5820,4615 v1(5840,4635) ; v1(6060,4605) 6060.2,4605.2 U4.57@6060.2,4671.4
  Bottom Layer w10: v1(5440,4580) 5455,4595 v1(5685,4595) ; v1(5840,4635) 5915,4560 5985,4560 6030,4605 v1(6060,4605)
BOOT0: H3.2 R1.1 U4.60 | length 1193
  Top Layer w10: R1.1@5985,4825 5985,4790 6001.1,4773.9 U4.60@6001.1,4671.4
  Bottom Layer w10: H3.2@5170,4955 5170,5010 5205,5045 5365,5045 5405,5085 5595,5085 5755,4925 5755,4920 5815,4860 5915,4860 v1(5989.6,4785.4)
BTN-ENC: P1.9 U4.50 | length 1896.6
  Top Layer w10: v1(5455,4645) 5465,4635 5465,4195 5430,4160 5430,4080 5400,4050 5400,3830 P1.9@5475,3755 ; v1(5685,4645) v1(5790,4645) ; v1(6175,4580) 6198,4603 U4.50@6198,4671.4
  Bottom Layer w10: v1(5455,4645) v1(5685,4645) ; v1(5790,4645) 5790,4565 5820,4535 6004.93,4535 6029.93,4560 6070,4560 6085,4545 6140,4545 v1(6175,4580)
CD-CS: CARD1.2 H4.4 RN1.4 U4.20 | length 1544.8
  Top Layer w10: U4.20@5981.4,4218.6 5981.4,3913.6 6135,3760 6215,3760 v1(6230,3745) ; v1(6230,3850) 6380,3850 6390,3860 6433.4,3860 CARD1.2@6435.3,3861.9 6437.2,3860 v1(6505,3860)
  Bottom Layer w10: v1(6230,3745) v1(6230,3850) ; v1(6505,3860) 6525,3860 6572.8,3812.2 RN1.4@6609.6,3812.2 6609.6,3864.6 6625,3880 6625,4210 H4.4@6620,4215
E0-DIR: P2.8 RN3.4 | length 241.4
  Top Layer w10: P2.8@5969.14,5143.15 6173.15,5143.15 6184.1,5154.1 RN3.4@6184.1,5176.02